# Altium PCB NODE_3_PCB.PcbDoc
Units mm, origin at the board's own origin, x right, y up, seen from the top; angles counter-clockwise.
Board outline 75 x 75.5 mm, 2 copper layers (Top Layer, Bottom Layer); 55 components, 41 nets, 260 pads, 0 vias.
Unrouted connection lines stored in the file: 141.
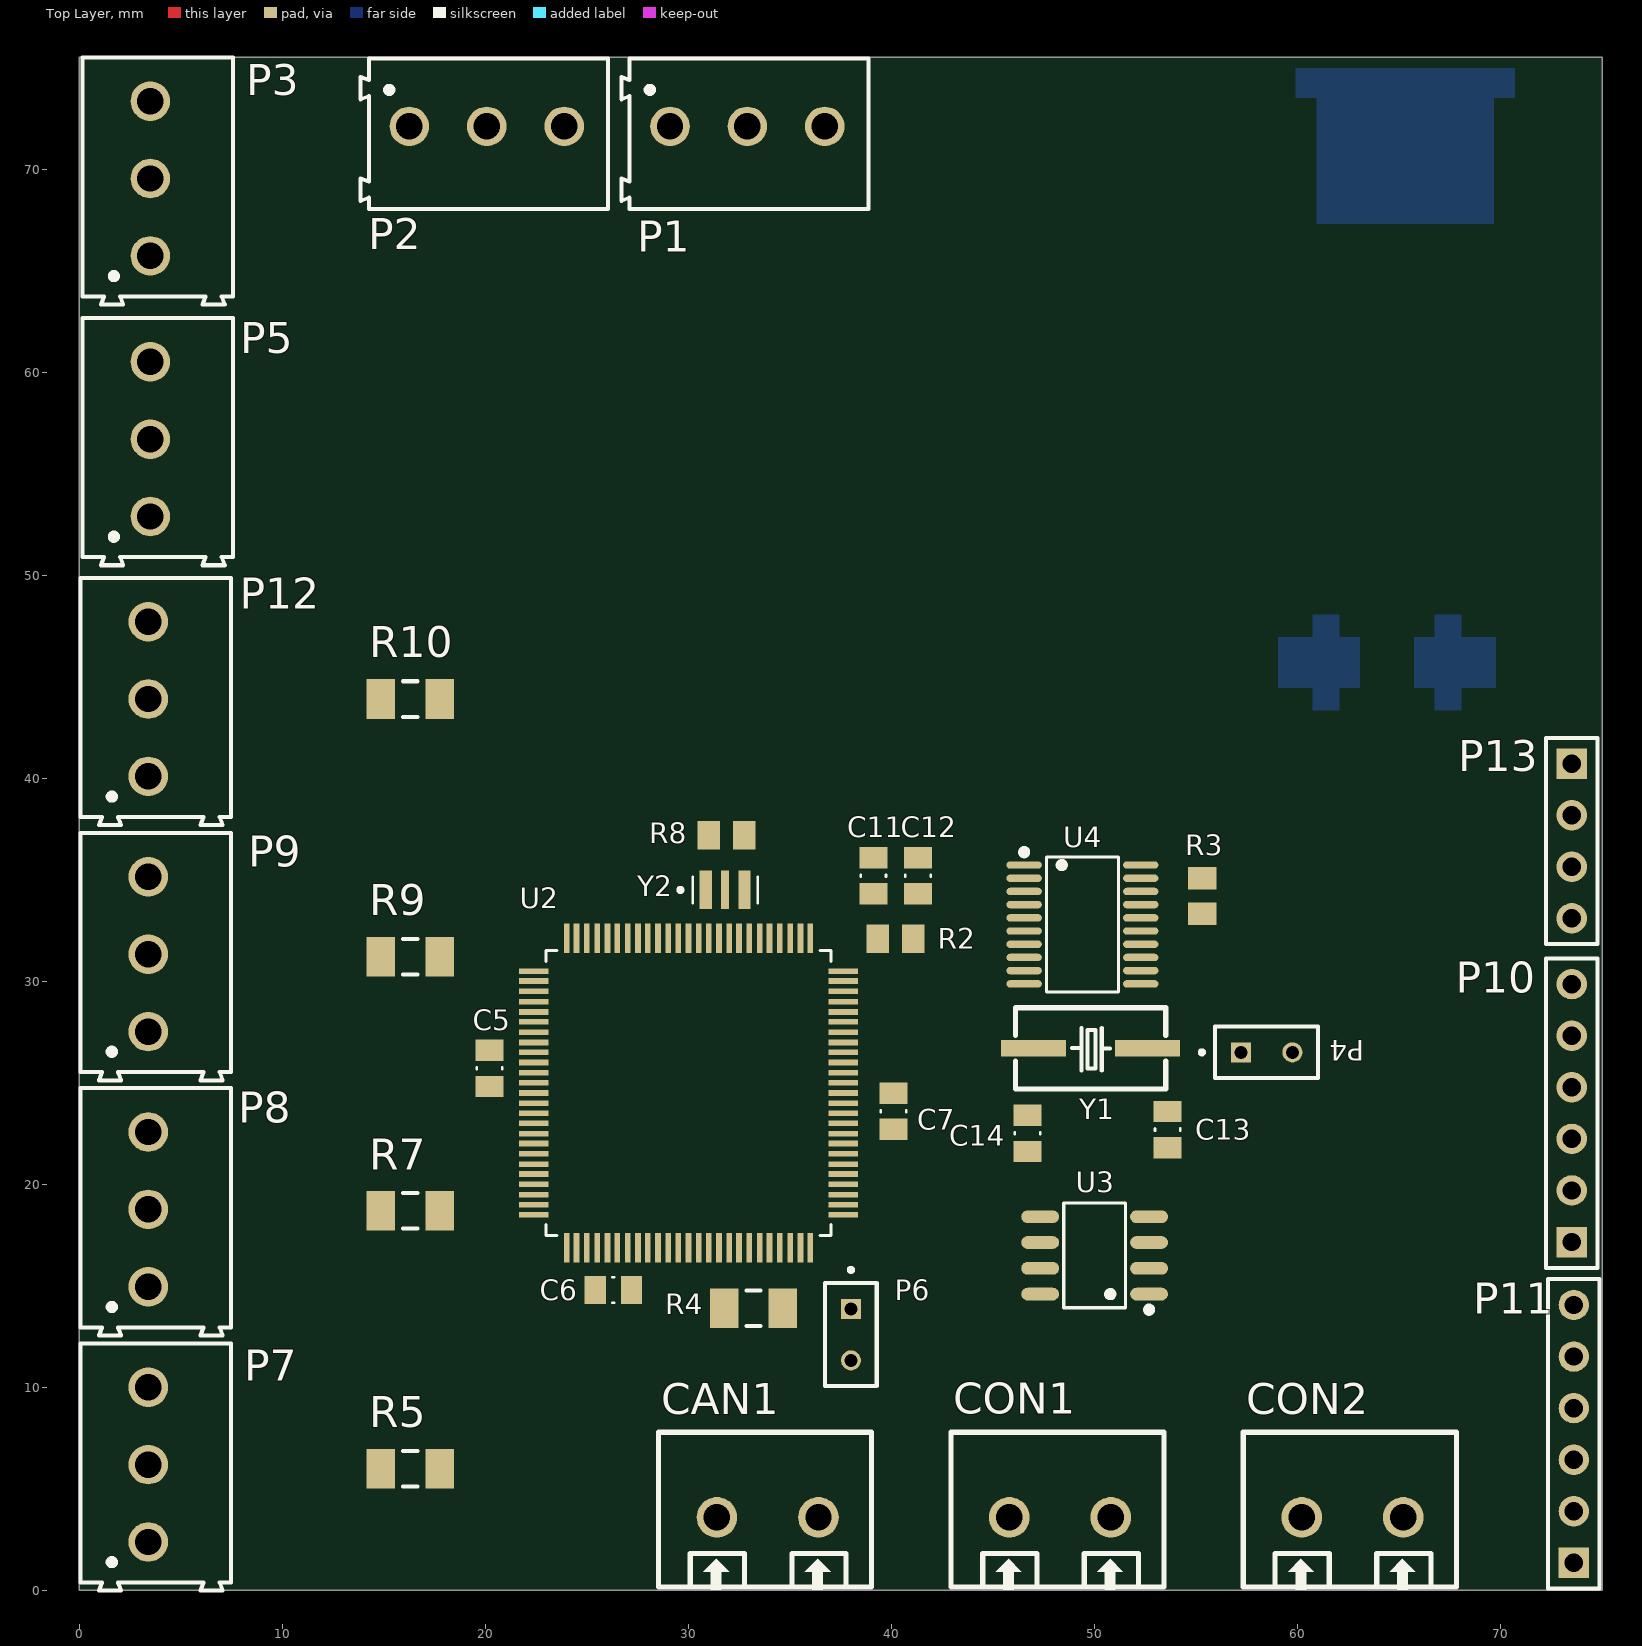
[diagram p0: Top Layer view]
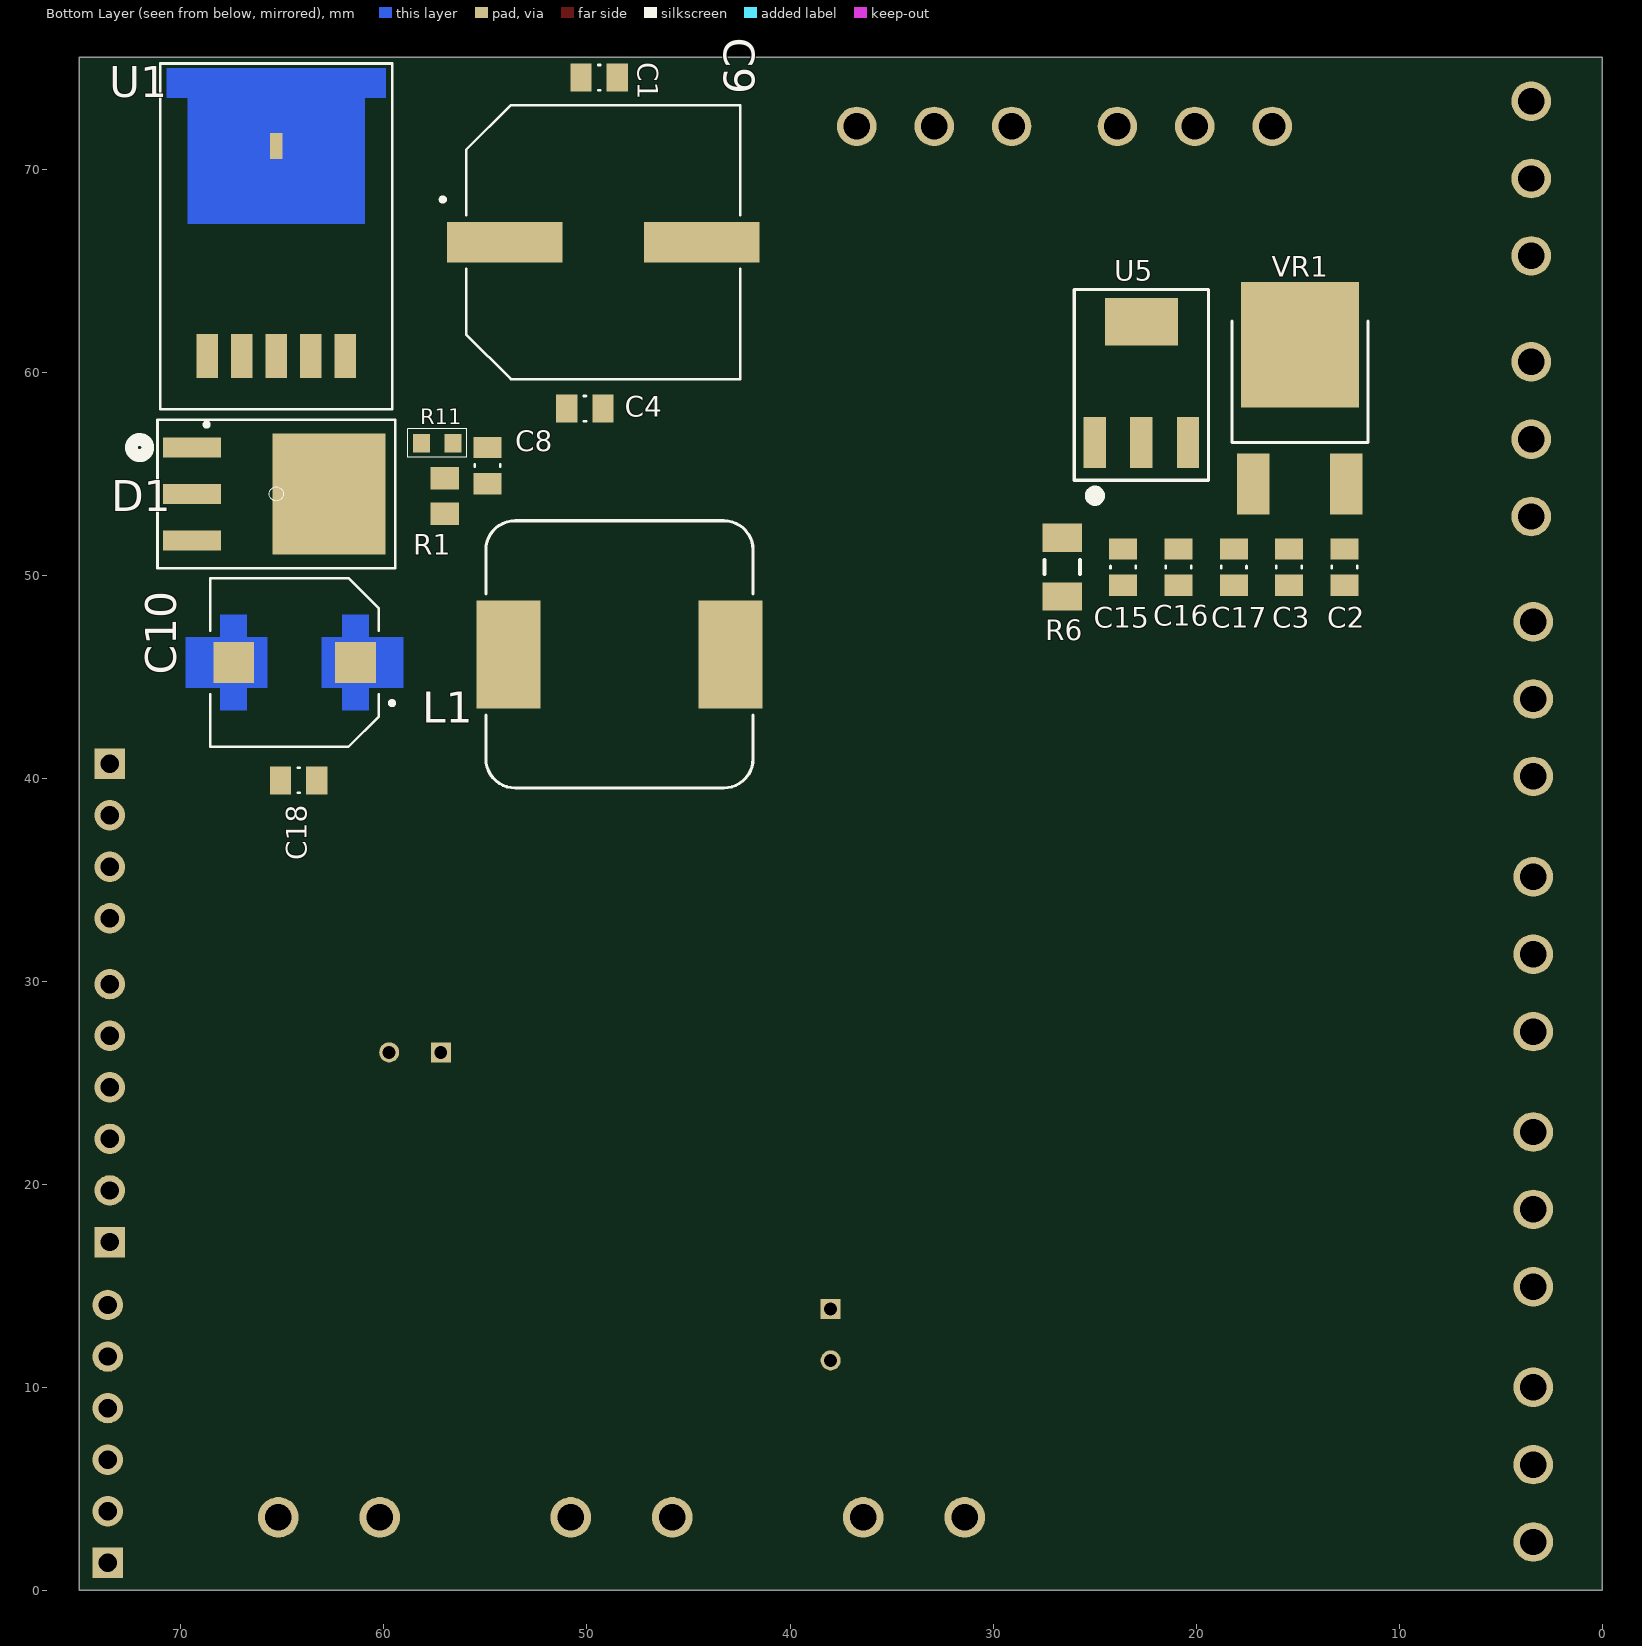
[diagram p1: Bottom Layer view, seen from below]

## Layer stack, top to bottom
Top Solder: solder mask 0.0102, Solder Resist, Dk 3.5
Top Layer: signal copper 0.0356
Dielectric 1: dielectric 0.32, FR-4, Dk 4.8
Bottom Layer: signal copper 0.0356
Bottom Solder: solder mask 0.0102, Solder Resist, Dk 3.5

## Board outline
0,0 75,0 75,75.5 0,75.5

## Design rules (kind name [scope] priority, off if disabled: settings)
Clearance [All] p1: gap=0.1 ignorepadtopadclearanceinfootprint=FALSE
PlaneClearance [All] p1: clearance=0.1
PolygonConnect [All] p1: connectstyle=Direct reliefconductorwidth=0.254 reliefentries=4 polygonreliefangle="90 Angle" airgapwidth=0.254
RoutingVias [All] p1: holewidth=0.711 width=1.27 viastyle="Through Hole" minholewidth=0.711 minwidth=1.27 maxholewidth=0.711 maxwidth=1.27
SolderMaskExpansion [All] p1: expansion=0.102 istentingtop=FALSE
Width [All] p1: maxlimit=0.254 minlimit=0.254 preferedwidth=0.254
29 further rules are at their usual default settings.

## Components (designator, comment, footprint, x,y, rotation, side; value= is the part's Value field where it differs from the comment)
C1 "Cap" CAPC2012X135N 49.4,74.5 r180 bottom value=1uF
C2 "Cap" CAPC2012X135N 12.7,50.4 r90 bottom value=10uF
C3 "Cap" CAPC2012X135N 15.423,50.4 r90 bottom value=10uF
C4 "Cap" CAPC2012X135N 50.1,58.2 r0 bottom value=1uF
C5 "Cap" CAPC2012X135N 20.2,25.71 r270 top value=100nF
C6 "Cap" CAPC2012X135N 26.3,14.8 r0 top value=100nF
C7 "Cap" CAPC2012X135N 40.1,23.6 r90 top value=100nF
C8 "Cap" CAPC2012X135N 54.9,55.4 r90 bottom value=33nF
C9 "EEVTG1H221Q" CAP_EEVTG1H221Q 49.2,66.4 r180 bottom value=220uF
C10 "EEEFN1E331V" CAP_EEEFN1E331V 64.4,45.7 r0 bottom value=330uF
C11 "Cap" CAPC2012X135N 39.1,35.2 r90 top value=22pF
C12 "Cap" CAPC2012X135N 41.3,35.2 r90 top value=100nF
C13 "Cap" CAPC2012X135N 53.6,22.7 r90 top value=30pF
C14 "Cap" CAPC2012X135N 46.7,22.51 r270 top value=30pF
C15 "Cap" CAPC2012X135N 23.592,50.4 r90 bottom value=100nF
C16 "Cap" CAPC2012X135N 20.869,50.4 r90 bottom value=10uF
C17 "Cap" CAPC2012X135N 18.146,50.4 r90 bottom value=100nF
C18 "Cap" CAPC2012X135N 64.2,39.9 r0 bottom value=1uF
CAN1 "CAN_PORT" 12V_CON 31.4,3.6 r0 top
CON1 "36VDC" 12V_CON 45.8,3.6 r0 top
CON2 "5V_SUPPLY" 12V_CON 60.2,3.6 r0 top
D1 "MBRD1045T4G" TO229P990X238-4N 65.3,54 r180 bottom value=10A
L1 "Inductor" IND_MWSA1206S_SNL 48.4,46.1 r180 bottom value=47uH
P1 "Header 3" 3PIN_H 32.9,72.1 r0 top
P2 "Header 3" 3PIN_H 20.067,72.1 r0 top
P3 "Header 3" 3PIN_H 3.5,69.533 r90 top
P4 "Header 2" SAMTEC_TS-102-G-A 58.47,26.5 r0 top
P5 "Header 3" 3PIN_H 3.5,56.7 r90 top
P6 "Header 2" SAMTEC_TS-102-G-A 38,12.6 r270 top
P7 "Header 3" 3PIN_H 3.4,6.2 r90 top
P8 "Header 3" 3PIN_H 3.4,18.767 r90 top
P9 "Header 3" 3PIN_H 3.4,31.333 r90 top
P10 "Header 6" HDR1X6 73.5,17.16 r90 top
P11 "Header 6" HDR1X6 73.6,1.36 r90 top
P12 "Header 3" 3PIN_H 3.4,43.9 r90 top
P13 "Header 4" HDR1X4 73.5,40.72 r270 top
R1 "Res2" RESC2013X06N 57,53.9 r270 bottom value=10K
R2 "Res2" RESC2013X06N 40.2,32.1 r0 top value=1K
R3 "Res2" RESC2013X06N 55.3,34.2 r90 top value=10K
R4 "Res2" CRCW1206120RFKEAHP 33.2,13.9 r180 top value=120
R5 "Res2" CRCW1206120RFKEAHP 16.3,6 r0 top value=480K
R6 "Res2" CRCW1206120RFKEAHP 26.6,50.4 r90 bottom value=480K
R7 "Res2" CRCW1206120RFKEAHP 16.3,18.7 r0 top value=480K
R8 "Res1" RESC2013X06N 31.875,37.2 r0 top value=1M
R9 "Res2" CRCW1206120RFKEAHP 16.3,31.2 r0 top value=480K
R10 "Res2" CRCW1206120RFKEAHP 16.3,43.9 r0 top value=480K
R11 "Res2" 0603_STANDARD 57.375,56.5 r180 bottom value=1.84K
U1 "XL4015" CONV_XL4015 65.3,71.135 r90 bottom value="DC/DC BUCK"
U2 "ATMEGA2560-16AU" QFP50P1600X1600X120-100N 30,24.5 r180 top
U3 "TJA1050DRG" "SOP-8_L4.9-W3.9-P1.27-LS6.0-BL - duplicate" 50,16.5 r90 top
U4 "MCP2515T-I/ST" TSSOP-20_L6.5-W4.4-P0.65-LS6.4-BL 49.4,32.8 r270 top
U5 "36-8V" SOT-223-3_L6.5-W3.4-P2.30-LS7.0-BR 22.7,59.5 r270 bottom
VR1 "5-3.3V" TO-252-2_L6.6-W6.1-P4.57-LS9.9-BR-CW 14.89,57.924 r270 bottom
Y1 "XTAL" CRYSTAL-SMD_L7.4-W4.0-LS8.0 49.8,26.7 r0 top value=8MHz
Y2 "CSTCE16M0V53-R0" OSC_CSTCE16M0V53-R0 31.8,34.5 r0 top value=16MHz

## Footprints (in the part's own frame and the unit in brackets; to place one, negate y for a bottom-side part, rotate by r counter-clockwise, add the part's x,y. Pads: shape width x height; smd on the part's side, far side on the other; paste and mask are expansions set on the pad)
3PIN_H [mm]
  round 1.95 hole 1.3: 1(-3.81,0) 2(0,0) 3(3.81,0)
  silkscreen extent -6.21,-4.06 5.97,3.34, body extent -5.84,-4.08 5.99,3.32, height 8.51
12V_CON [mm]
  round 2 hole 1.3 paste-2539.97 mask+0.051: 1(0,0) 2(5,0)
  silkscreen extent -2.88,-3.56 7.62,4.19, body extent -2.96,-3.43 7.54,4.17, height 10
0603_STANDARD [mm]
  rect 0.85x0.9 smd: 1(-0.775,0) 2(0.775,0)
  silkscreen extent -1.45,-0.7 1.45,0.7, body extent -0.85,-0.45 0.85,0.45, height 0.55
CAP_EEEFN1E331V [mm]
  rect 2x2 smd paste-2 mask+0: 1(-3,0) 2(3,0)
  Top Layer region: 3.65,1.25 5.35,1.25 5.35,-1.25 3.65,-1.25 3.65,-2.35 2.35,-2.35 2.35,-1.25 1.35,-1.25 1.35,1.25 2.35,1.25 2.35,2.35 3.65,2.35
  Top Layer region: -2.35,1.25 -1.35,1.25 -1.35,-1.25 -2.35,-1.25 -2.35,-2.35 -3.65,-2.35 -3.65,-1.25 -5.35,-1.25 -5.35,1.25 -3.65,1.25 -3.65,2.35 -2.35,2.35
  silkscreen extent -4.9,-4.15 4.15,4.15, body extent -4.85,-4.15 4.85,4.15, height 10.5
CAP_EEVTG1H221Q [mm]
  rect 5.7x2 smd: 1(-4.85,0) 2(4.85,0)
  silkscreen extent -8,-6.75 6.75,6.75, body extent -7.45,-6.75 7.45,6.75, height 13.5
CAPC2012X135N [mm]
  rect 1.05x1.38 smd: 1(-0.89,0) 2(0.89,0)
  silkscreen extent -0.05,-0.63 0.05,0.63, body extent -1,-0.63 1,0.63, height 1.35
CONV_XL4015 [mm]
  rect 2.16x1.07 smd: 1(-10.335,3.4) 2(-10.335,1.7) 3(-10.335,0) 4(-10.335,-1.7) 5(-10.335,-3.4)
  rect 1.27x0.635 smd paste-2 mask+0: 3.1(0,0)
  Top Layer region: 3.835,-5.4 2.365,-5.4 2.365,-4.35 -3.835,-4.35 -3.835,4.35 2.365,4.35 2.365,5.4 3.835,5.4
  silkscreen extent -13.82,-5.71 4.06,5.72, body extent -11.33,-5.08 3.33,5.08, height 4.84
CRCW1206120RFKEAHP [mm] "Chip Resistor, 2-Leads, Body 3.10x1.60mm, IPC Medium Density"
  rect 1.4x1.95 smd: 1(-1.45,0) 2(1.45,0)
  silkscreen extent -0.35,-0.87 0.35,0.87, body extent -1.65,-0.87 1.65,0.87, height 0.65
CRYSTAL-SMD_L7.4-W4.0-LS8.0 [mm]
  rect 3.2x0.8 smd paste+0 mask+0.05: 1(-2.8,0) 2(2.8,0)
  silkscreen extent -3.7,-2 3.7,2, body extent -3.84,-2.08 3.76,2.02, height 2.23
HDR1X4 [mm] "Connector; Header; 4 Position"
  rect 1.5x1.5 hole 0.9: 1(0,0)
  round 1.5 hole 0.9: 2(2.54,0) 3(5.08,0) 4(7.62,0)
  silkscreen extent -1.27,-1.27 8.89,1.27
HDR1X6 [mm] "Connector; Header; 6 Position"
  rect 1.5x1.5 hole 0.9: 1(0,0)
  round 1.5 hole 0.9: 2(2.54,0) 3(5.08,0) 4(7.62,0) 5(10.16,0) 6(12.7,0)
  silkscreen extent -1.27,-1.27 13.97,1.27
IND_MWSA1206S_SNL [mil]
  rect 124x209 smd paste+0 mask+0: 1(-215.5,0) 2(215.5,0)
  silkscreen extent -259,-259 259,259, body extent -271,-254 271,254, height 238
OSC_CSTCE16M0V53-R0 [mm]
  rect 0.6x1.9 smd: 1(-0.95,0) 3(0.95,0)
  rect 0.4x1.9 smd: 2(0,0)
  silkscreen extent -2.3,-0.65 1.6,0.65, body extent -1.6,-0.65 1.6,0.65, height 1
QFP50P1600X1600X120-100N [mil]
  rect 58x11 smd: 1(-300,236) 2(-300,217) 3(-300,197) 4(-300,177) 5(-300,157) 6(-300,138) 7(-300,118) 8(-300,98) 9(-300,79) 10(-300,59) 11(-300,39) 12(-300,20) 13(-300,0) 14(-300,-20) 15(-300,-39) 16(-300,-59) 17(-300,-79) 18(-300,-98) 19(-300,-118) 20(-300,-138) 21(-300,-157) 22(-300,-177) 23(-300,-197) 24(-300,-217) 25(-300,-236) 51(300,-236) 52(300,-217) 53(300,-197) 54(300,-177) 55(300,-157) 56(300,-138) 57(300,-118) 58(300,-98) 59(300,-79) 60(300,-59) 61(300,-39) 62(300,-20) 63(300,0) 64(300,20) 65(300,39) 66(300,59) 67(300,79) 68(300,98) 69(300,118) 70(300,138) 71(300,157) 72(300,177) 73(300,197) 74(300,217) 75(300,236)
  rect 11x58 smd: 26(-236,-300) 27(-217,-300) 28(-197,-300) 29(-177,-300) 30(-157,-300) 31(-138,-300) 32(-118,-300) 33(-98,-300) 34(-79,-300) 35(-59,-300) 36(-39,-300) 37(-20,-300) 38(0,-300) 39(20,-300) 40(39,-300) 41(59,-300) 42(79,-300) 43(98,-300) 44(118,-300) 45(138,-300) 46(157,-300) 47(177,-300) 48(197,-300) 49(217,-300) 50(236,-300) 76(236,300) 77(217,300) 78(197,300) 79(177,300) 80(157,300) 81(138,300) 82(118,300) 83(98,300) 84(79,300) 85(59,300) 86(39,300) 87(20,300) 88(0,300) 89(-20,300) 90(-39,300) 91(-59,300) 92(-79,300) 93(-98,300) 94(-118,300) 95(-138,300) 96(-157,300) 97(-177,300) 98(-197,300) 99(-217,300) 100(-236,300)
  silkscreen extent -276,-276 276,276, body extent -315,-315 315,315, height 47
RESC2013X06N [mm] "Chip Resistor, 2-Leads, Body 2.00x1.27mm, IPC Medium Density"
  rect 1.1x1.4 smd: 1(-0.875,0) 2(0.875,0)
  body extent -1.07,-0.7 1.07,0.7, height 0.65
SAMTEC_TS-102-G-A [mm]
  rect 0.985x0.985 hole 0.635: 1(-1.27,0)
  round 0.985 hole 0.635: 2(1.27,0)
  silkscreen extent -3.29,-1.27 2.54,1.27, body extent -2.64,-1.4 2.64,1.14, height 8.29
"SOP-8_L4.9-W3.9-P1.27-LS6.0-BL - duplicate" [mm]
  oval 0.63x1.865 smd paste+0 mask+0.051: 1(-1.905,-2.682) 2(-0.635,-2.682) 3(0.635,-2.682) 4(1.905,-2.682) 5(1.905,2.682) 6(0.635,2.682) 7(-0.635,2.682) 8(-1.905,2.682)
  silkscreen extent -2.82,-2.83 2.58,1.52
SOT-223-3_L6.5-W3.4-P2.30-LS7.0-BR [mm]
  rect 2.5x1.1 smd paste+0 mask+0.051: 1(2.97,-2.3) 2(2.97,0) 3(2.97,2.3)
  rect 2.34x3.6 smd paste+0 mask+0.051: 4(-2.97,0)
  silkscreen extent -4.57,-3.3 5.84,3.3, body extent -3.88,-3.25 3.12,3.25, height 1.71
TO229P990X238-4N [mm]
  rect 2.85x1 smd: 1(-4.15,2.29) 2(-4.15,0) 3(-4.15,-2.29)
  rect 5.55x5.95 smd: 4(2.6,0)
  silkscreen extent -7.13,-3.65 5.85,3.65, body extent -5.08,-3.25 4.83,3.25, height 2.4
TO-252-2_L6.6-W6.1-P4.57-LS9.9-BR-CW [mm]
  rect 3x1.6 smd paste+0 mask+0.051: 1(3.424,-2.29) 3(3.424,2.29)
  rect 6.2x5.8 smd paste+0 mask+0.051: 2(-3.424,0)
  silkscreen extent -4.58,-3.35 1.38,3.35, body extent -6.22,-3.29 3.7,3.29, height 2.29
TSSOP-20_L6.5-W4.4-P0.65-LS6.4-BL [mm]
  oval 0.364x1.742 smd paste+0 mask+0.051: 1(-2.925,-2.871) 2(-2.275,-2.871) 3(-1.625,-2.871) 4(-0.975,-2.871) 5(-0.325,-2.871) 6(0.325,-2.871) 7(0.975,-2.871) 8(1.625,-2.871) 9(2.275,-2.871) 10(2.925,-2.871) 11(2.925,2.871) 12(2.275,2.871) 13(1.625,2.871) 14(0.975,2.871) 15(0.325,2.871) 16(-0.325,2.871) 17(-0.975,2.871) 18(-1.625,2.871) 19(-2.275,2.871) 20(-2.925,2.871)
  silkscreen extent -3.71,-3.02 3.33,1.77, body extent -3.25,-3.3 3.25,3.1, height 1.06

## Part data
C1 C4 C18: "Capacitor", Part Number=CL21B105KBFNNNE, LatestRevisionDate=17-Jul-2002, LatestRevisionNote="Re-released for DXP Platform.", PackageDescription="Radial Cap, Thru-Hole; 2 Leads; 0.3 in Pin Spacing", PackageReference=RAD-0.3, Published=8-Jun-2000, Publisher="Altium Limited"
C2 C3 C16: "Capacitor", Part Number=CL21A106KOQNNNE, LatestRevisionDate=17-Jul-2002, LatestRevisionNote="Re-released for DXP Platform.", PackageDescription="Radial Cap, Thru-Hole; 2 Leads; 0.3 in Pin Spacing", PackageReference=RAD-0.3, Published=8-Jun-2000, Publisher="Altium Limited"
C5 C6 C7 C12 C15 C17: "Capacitor", Part Number=TCC0805X7R104M500DT, LatestRevisionDate=17-Jul-2002, LatestRevisionNote="Re-released for DXP Platform.", PackageDescription="Radial Cap, Thru-Hole; 2 Leads; 0.3 in Pin Spacing", PackageReference=RAD-0.3, Published=8-Jun-2000, Publisher="Altium Limited"
  C15 C17: PN=TCC0805X7R104M500DT
C8: "Capacitor", Part Number=TCC0805X7R333M500DT, LatestRevisionDate=17-Jul-2002, LatestRevisionNote="Re-released for DXP Platform.", PackageDescription="Radial Cap, Thru-Hole; 2 Leads; 0.3 in Pin Spacing", PackageReference=RAD-0.3, Published=8-Jun-2000, Publisher="Altium Limited"
C9: "220ÂµF 50V Aluminum Electrolytic Capacitors Radial, Can - SMD 230mOhm @ 100kHz 2000 Hrs @ 125Â°C", Package="RADIAL-2 Panasonic", Part Number=EEV-TG1H221Q, Availability="No availability data", Check_prices=https://www.snapeda.com/parts/EEV-TG1H221Q/Panasonic%20Electronic%20Components/view-part/1236528/?ref=eda, MF="Panasonic Electronic", Price=None, Purchase-URL=https://pricing.snapeda.com/search/part/EEV-TG1H221Q/?ref=eda, SnapEDA_Link=https://www.snapeda.com/parts/EEV-TG1H221Q/Panasonic%20Electronic%20Components/view-part/1236528/?ref=snap
C10: "CAP ALUM 330UF 20% 25V SMD", Package="RADIAL-2 Panasonic", Check_prices=https://www.snapeda.com/parts/EEEFN1E331V/Panasonic/view-part/5787983/?ref=eda, Digi-Key_Part_Number=10-EEE-FN1E331VTR-ND, MF=Panasonic, Part Number=EEEFN1E331V, SnapEDA_Link=https://www.snapeda.com/parts/EEEFN1E331V/Panasonic/view-part/5787983/?ref=snap
C11: "Capacitor", Part Number=TCC0805COG220J500BT, LatestRevisionDate=17-Jul-2002, LatestRevisionNote="Re-released for DXP Platform.", PackageDescription="Radial Cap, Thru-Hole; 2 Leads; 0.3 in Pin Spacing", PackageReference=RAD-0.3, Published=8-Jun-2000, Publisher="Altium Limited"
C13 C14: "Capacitor", Part Number=TCC0805COG300J500BT, LatestRevisionDate=17-Jul-2002, LatestRevisionNote="Re-released for DXP Platform.", PackageDescription="Radial Cap, Thru-Hole; 2 Leads; 0.3 in Pin Spacing", PackageReference=RAD-0.3, Published=8-Jun-2000, Publisher="Altium Limited"
CAN1: library part 2PIN_CON_1, Part Number=MX126-5.0-02P-GN01-Cu-S-A
CON1: library part 2PIN_CON_2, Part Number=MX126-5.0-02P-GN01-Cu-S-A
CON2: library part 2PIN_CON, Part Number=MX126-5.0-02P-GN01-Cu-S-A
D1: "Diode Schottky 45V 10A Surface Mount DPAK", Package="DPAK-3 ON Semiconductor", Availability=Warning, Check_prices=https://www.snapeda.com/parts/MBRD1045T4G/ON%20Semiconductor/view-part/326366/?ref=eda, MF="ON Semiconductor", Part Number=MBRD1045T4G, Price=None, Purchase-URL=https://pricing.snapeda.com/search/part/MBRD1045T4G/?ref=eda, SnapEDA_Link=https://www.snapeda.com/parts/MBRD1045T4G/ON%20Semiconductor/view-part/326366/?ref=snap
L1: Part Number=MWSA1206S-470MT, Code_IEC=1005, Code_JEITA=0402, LatestRevisionDate=29-May-2009, LatestRevisionNote="IPC-7351 Footprint Added.", PackageDescription="Chip Inductor", PackageReference=0402-A, Published=8-Jun-2000, Publisher="Altium Limited"
P1 P2 P3 P5 P7 P8 P9 P12: "Header, 3-Pin", Part Number=DB125-3.81-3P-BK-S, LatestRevisionDate=17-Jul-2002, LatestRevisionNote="Re-released for DXP Platform.", Publisher="Altium Limited"
  P3: ComponentLink1Description="DATA SHEET", ComponentLink1URL=https://cdn.shopify.com/s/files/1/0570/1766/3541/files/DS525_Technical_Specification.pdf?v=1700473172
P4 P6: "Header, 2-Pin", Part Number=PH-01078, LatestRevisionDate=17-Jul-2002, LatestRevisionNote="Re-released for DXP Platform.", Publisher="Altium Limited"
P10 P11: "Header, 6-Pin", Part Number=HB-PH3-25414PB2GOP, LatestRevisionDate=17-Jul-2002, LatestRevisionNote="Re-released for DXP Platform.", Publisher="Altium Limited"
P13: "Header, 4-Pin", Part Number=P125-1106A0BS116A1, LatestRevisionDate=17-Jul-2002, LatestRevisionNote="Re-released for DXP Platform.", Publisher="Altium Limited"
R1 R3: "Resistor", Part Number=RC0805JR-0710KL, LatestRevisionDate=17-Jul-2002, LatestRevisionNote="Re-released for DXP Platform.", PackageDescription="Axial Device, Thru-Hole; 2 Leads; 0.4 in Pin Spacing", PackageReference=AXIAL-0.4, Published=8-Jun-2000, Publisher="Altium Limited"
R2: "Resistor", Part Number=0805W8J0102T5E, LatestRevisionDate=17-Jul-2002, LatestRevisionNote="Re-released for DXP Platform.", PackageDescription="Axial Device, Thru-Hole; 2 Leads; 0.4 in Pin Spacing", PackageReference=AXIAL-0.4, Published=8-Jun-2000, Publisher="Altium Limited"
R4: "Resistor", Part Number=CRCW1206120RFKEAHP, LatestRevisionDate=17-Jul-2002, LatestRevisionNote="Re-released for DXP Platform.", PackageDescription="Axial Device, Thru-Hole; 2 Leads; 0.4 in Pin Spacing", PackageReference=AXIAL-0.4, Published=8-Jun-2000, Publisher="Altium Limited"
R5 R6 R7 R9 R10: "Resistor", Part Number=1206W4J0484T5E, LatestRevisionDate=17-Jul-2002, LatestRevisionNote="Re-released for DXP Platform.", PackageDescription="Axial Device, Thru-Hole; 2 Leads; 0.4 in Pin Spacing", PackageReference=AXIAL-0.4, Published=8-Jun-2000, Publisher="Altium Limited"
R8: "Resistor", Part Number=RC0805JR-071KL, LatestRevisionDate=17-Jul-2002, LatestRevisionNote="Re-released for DXP Platform.", PackageDescription="Axial Device, Thru-Hole; 2 Leads; 0.3 in Pin Spacing", PackageReference=AXIAL-0.3, Published=8-Jun-2000, Publisher="Altium Limited"
R11: "Resistor", Part Number=RT0603BRD071K84L, LatestRevisionDate=17-Jul-2002, LatestRevisionNote="Re-released for DXP Platform.", PackageDescription="Axial Device, Thru-Hole; 2 Leads; 0.4 in Pin Spacing", PackageReference=AXIAL-0.4, Published=8-Jun-2000, Publisher="Altium Limited"
U1: "5A 180KHz 36V Buck DC to DC Converter", Package=None, Part Number=XL4015E1, Availability=Unavailable, ComponentLink1Description="DATA SHEET", ComponentLink1URL=https://components101.com/sites/default/files/component_datasheet/XL4015-DC-DC-Module-Datasheet.pdf, Price=None
U2: "AVR AVRÂ® ATmega Microcontroller IC 8-Bit 16MHz 256KB (128K x 16) FLASH 100-TQFP (14x14)", Package="TQFP-100 Microchip", Availability="In Stock", Check_prices=https://www.snapeda.com/parts/ATMEGA2560-16AU/Microchip/view-part/?ref=eda, MF=Microchip, Part Number=ATMEGA2560-16AU, Price=None, Purchase-URL=https://pricing.snapeda.com/search?q=ATMEGA2560-16AU&ref=eda, SnapEDA_Link=https://www.snapeda.com/parts/ATMEGA2560-16AU/Microchip/view-part/?ref=snap
U3: JLCPCB Part Class="Extended Part", Manufacturer=HGC(深圳汉芯), Add into BOM=yes, Convert to PCB=yes, Datasheet=https://atta.szlcsc.com/upload/public/pdf/source/20231229/9EC40A6172CAB0350BF7AF3421F4DEBF.pdf, Device=TJA1050DRG, LCSC Part Name=TJA1050DRG, Part Number=TJA1050DRG, Supplier=LCSC, Supplier Footprint=SOP-8, Supplier Part=C19723770, Symbol=TJA1050DRG
U4: JLCPCB Part Class="Extended Part", LCSC Part Name=2.7V~5.5V, Manufacturer=MICROCHIP(美国微芯), Operating Temperature=-40℃~+85℃, Supply Current=10mA, Add into BOM=yes, Convert to PCB=yes, Datasheet=https://atta.szlcsc.com/upload/public/pdf/source/20180521/C185941_CF4E8B602AE128DB1B8E6B0AB1F829A7.pdf, Device=MCP2515T-I/ST, Part Number=MCP2515T-I/ST, Supplier=LCSC, Supplier Footprint=TSSOP-20, Supplier Part=C185941, Supply Voltage=2.7V~5.5V, Symbol=MCP2515T-I/ST
U5: library part LT3088MPST#PBF, "LDO Regulator Pos 0V to 34.5V 0.8A Automotive 4-Pin(3+Tab) SOT-223 Tube", Manufacturer="Analog Devices / Linear Technology", Supplier Part Number=584-LT3088MPST#PBF, Category="Voltage Regulators - Linear", ComponentLink1Description=http://www.linear.com/docs/46566?src-supplier=Digikey, ComponentLink1URL=http://www.linear.com/docs/46566?src-supplier=Digikey, Part Number=LT3088MPST#PBF, Pricing="1=13.29, 10=12.21, 50=11.71, 100=10.32, 1000=9.18, 10000=9.18 (USD)", RoHS=Yes, Stock=477, Supplier=Mouser
VR1: library part "Volt Reg", "Voltage Regulator", Part Number=AP7363-33D-13, LatestRevisionDate=29-May-2009, LatestRevisionNote="IPC-7351 Footprint Added.", PackageDescription="3-Pin Transistor Outline Package 2.54 mm Pitch, 15.1 mm Lead Span", PackageReference=D2PAK, Published=24-Mar-1999, Publisher="Altium Limited"
Y1: "Crystal Oscillator", Part Number=S47SMD8.000M12PF20R30B3, LatestRevisionDate=17-Jul-2002, LatestRevisionNote="Re-released for DXP Platform.", PackageDescription="Crystal, Thru-Hole; 2 Leads; Body 3.1 x 8.2 mm (Dia.xH)", PackageReference=R38, Published=8-Jun-2000, Publisher="Altium Limited"
Y2: "16 MHz Ceramic Resonator Built in Capacitor 15 pF Â±0.3% -20Â°C ~ 80Â°C Surface Mount", Package="SMD-3 Murata", Availability="In Stock", Check_prices=https://www.snapeda.com/parts/CSTCE16M0V53-R0/Murata+Electronics+North+America/view-part/?ref=eda, MF=Murata, Part Number=CSTCE16M0V53-R0, Price=None, Purchase-URL=https://pricing.snapeda.com/search/part/CSTCE16M0V53-R0/?ref=eda, SnapEDA_Link=https://www.snapeda.com/parts/CSTCE16M0V53-R0/Murata+Electronics+North+America/view-part/?ref=snap

## Nets (pads, with @x,y where several pads share a name; then routed paths per layer and width w, separated by ;. In a path a pad name is that pad's centre, name@x,y a point inside that pad or via, vN(x,y) a via of type N, cw(c..) or ccw(c..) an arc to the next point about the centre after c; other vN are vias at no path point)
3V3: C3.2 VR1.3
5V: C2.2 C5.1 C6.1 C7.1 C12.1 CON2.1 P1.1 P2.1 P10.1 P11.1 P13.1 R2.2 R3.2 R5.2 R7.2 R9.2 R10.2 U2.10 U2.31 U2.61 U2.80 U2.98 U2.100 U3.3 U4.20 VR1.1
8V: C8.1 C10.1 C18.1 L1.2 P3.1 P5.1 R1.2
24V: C16.2 P7.1 P8.1 P9.1 P12.1 U5.3 U5.4
36V: C1.1 C4.1 C9.1 C15.2 CON1.1 U1.5 U5.2
CAN_ENABLE: U2.19 U4.18
CAN_INT: U2.45 U4.13
FB: C8.2 R1.1 R11.2 U1.2
GND: C1.2 C2.1 C3.1 C5.2 C6.2 C7.2 C9.2 C10.2 C11.2 C12.2 C13.1 C14.2 C15.1 C16.1 C17.1 C18.2 CON1.2 CON2.2 D1.1 D1.3 P1.3 P2.3 P3.3 P5.3 P7.3 P8.3 P9.3 P10.2 P11.2 P12.3 P13.4 R6.1 R11.1 U1.1 U2.11 U2.32 U2.62 U2.81 U2.99 U3.2 U3.8 U4.10 VR1.2 Y2.2
LMT_1: P7.2 R5.1 U2.78
LMT_2: P8.2 R7.1 U2.77
LMT_3: P9.2 R9.1 U2.76
LMT_4: P12.2 R10.1 U2.75
MISO: P4.2 P11.4 U2.22
MOSI: P11.3 U2.21 U4.16
NetC4_2: C4.2 U1.4
NetC13_2: C13.2 U4.9 Y1.2
NetC14_1: C14.1 U4.8 Y1.1
NetC17_2: C17.2 R6.2 U5.1
NetCAN1_1: CAN1.1 R4.2 U3.7
NetCAN1_2: CAN1.2 P6.2 U3.6
NetD1_4: D1.4 L1.1 U1.3
NetP4_1: P4.1 U4.17
NetP6_1: P6.1 R4.1
NetR3_1: R3.1 U4.19
NetU3_1: U3.1 U4.1
nRESET: C11.1 P11.6 R2.1 U2.30
RX: P13.2 U2.2
RXCAN: U3.4 U4.2
SCK: P11.5 U2.20 U4.14
SERVO_1: P1.2 U2.1
SERVO_2: P2.2 U2.5
SERVO_3: P3.2 U2.15
SERVO_4: P5.2 U2.16
TCK: P10.6 U2.93
TDI: P10.3 U2.90
TDO: P10.4 U2.91
TMS: P10.5 U2.92
TX: P13.3 U2.3
XTAL1: R8.1 U2.34 Y2.1
XTAL2: R8.2 U2.33 Y2.3
pads on no net: D1.2 U1.3.1 U2.4 U2.6 U2.7 U2.8 U2.9 U2.12 U2.13 U2.14 U2.17 U2.18 U2.23 U2.24 U2.25 U2.26 U2.27 U2.28 U2.29 U2.35 U2.36 U2.37 U2.38 U2.39 U2.40 U2.41 U2.42 U2.43 U2.44 U2.46 U2.47 U2.48 U2.49 U2.50 U2.51 U2.52 U2.53 U2.54 U2.55 U2.56 U2.57 U2.58 U2.59 U2.60 U2.63 U2.64 U2.65 U2.66 U2.67 U2.68 U2.69 U2.70 U2.71 U2.72 U2.73 U2.74 U2.79 U2.82 U2.83 U2.84 U2.85 U2.86 U2.87 U2.88 U2.89 U2.94 U2.95 U2.96 U2.97 U3.5 U4.3 U4.4 U4.5 U4.6 U4.7 U4.11 U4.12 U4.15